# EAGLE board megashield_rs485 (EAGLE 7.3.0)
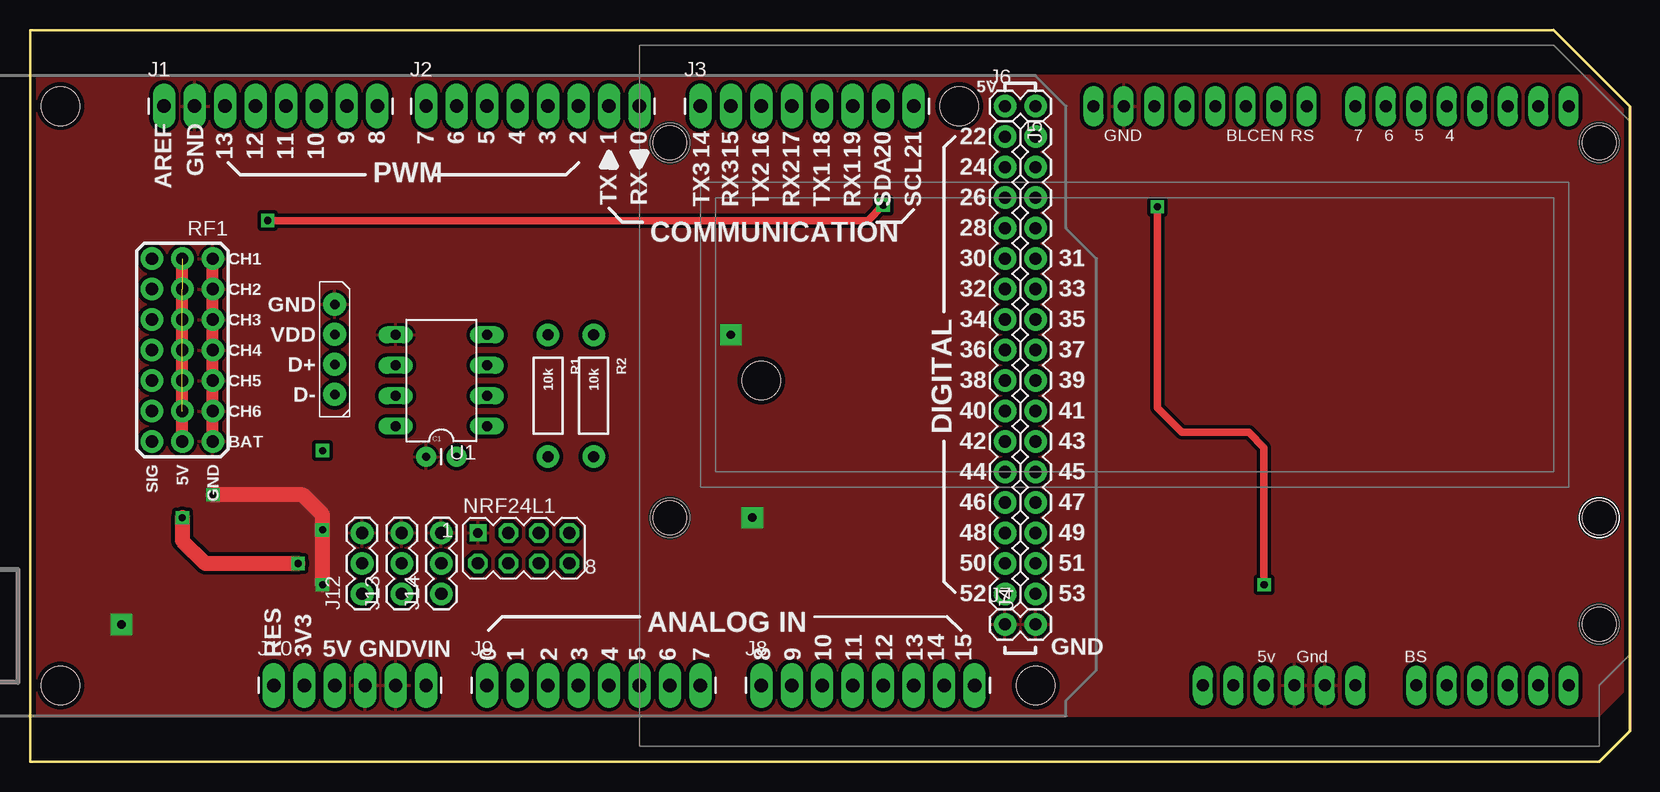
[diagram p0: board, top side]
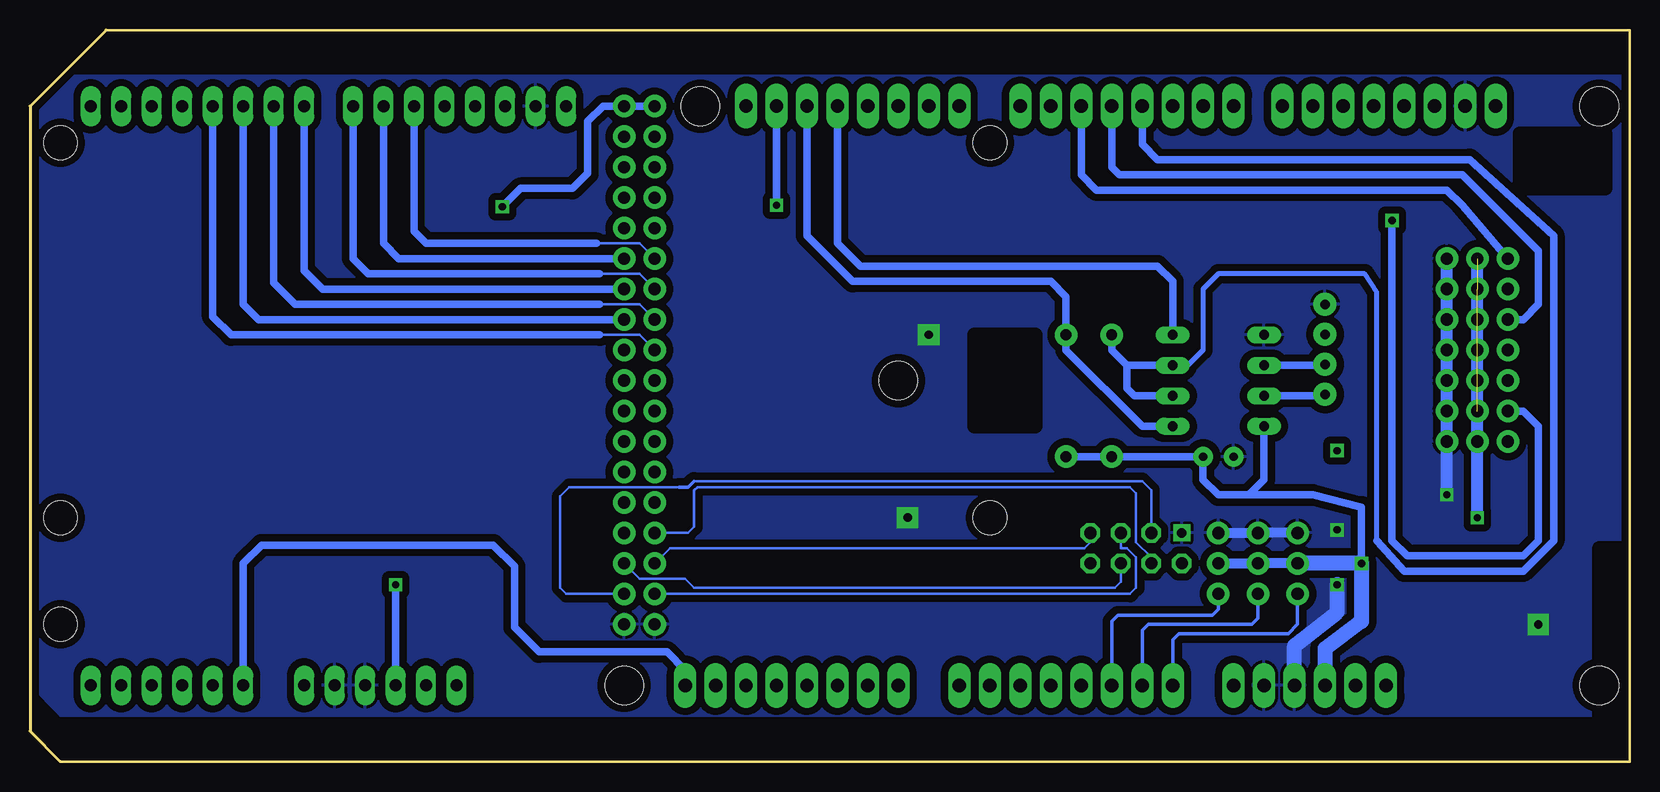
[diagram p1: board, bottom side, seen from below]

Size 133.35 x 60.96 mm. Coordinates in mm from the lower left corner, seen from the top.
Outline: 0,0 130.81,0 133.35,2.54 133.35,54.61 127,60.96 0,60.96 0,0
Copper layers (1*16): Top 0.035mm / dielectric 1.5mm / Bottom 0.035mm
Design rules "config_through_hole": minimum track width 8mil, minimum drill 20mil, track to track 9mil, track to pad 9mil, pad to pad 9mil, via to via 9mil, smd to smd 8mil, copper to edge 15mil, drill to drill 8mil, minimum pad ring 12mil, minimum via ring 10mil, stop-mask expansion 4mil, vias tented up to drill 25mil, thermal gap 10mil
Holes 3.2 mm at 2.54,54.61 2.54,6.35 77.47,54.61 83.82,6.35 60.96,31.75
Holes 2.8 mm at 130.81,51.56 130.81,20.32 130.81,11.43 53.34,20.32 53.34,51.56
bRestrict: area 49.5,27.9 to 54.6,35.6; area 2,47.8 to 9.1,52.3; area -12.7,34.3 to -1.3,57.2; area -12.7,3.8 to 2.5,17.8

## Footprints (pad centres in the part's own frame; a part is rotated, then mirrored left to right if it is on the bottom)
CAP-PTH-SMALL = drill 0.7 pad 1.651: 1 0,0; 2 2.54,0
1X08_LONGPADS = drill 1.118 pad 1.88 long: 1 0,0; 2 2.54,0; 3 5.08,0; 4 7.62,0; 5 10.16,0; 6 12.7,0; 7 15.24,0; 8 17.78,0
1X16 = drill 1.016 pad 1.88: 1 0,0; 2 2.54,0; 3 5.08,0; 4 7.62,0; 5 10.16,0; 6 12.7,0; 7 15.24,0; 8 17.78,0; 9 20.32,0; 10 22.86,0; 11 25.4,0; 12 27.94,0; 13 30.48,0; 14 33.02,0; 15 35.56,0; 16 38.1,0
1X02 = drill 1.016 pad 1.88: 1 0,0; 2 2.54,0
1X06_LONGPADS = drill 1.118 pad 1.88 long: 1 0,0; 2 2.54,0; 3 5.08,0; 4 7.62,0; 5 10.16,0; 6 12.7,0
DYNAMIXEL_SPOX_04 = drill 0.8 pad 1.93: 1 0,0; 2 2.5,0; 3 5,0; 4 7.5,0
1X03 = drill 1.016 pad 1.88: 1 0,0; 2 2.54,0; 3 5.08,0
LCD_SHIELD = drill 1 pad 1.676 long: 5V 52.07,5.08; BLC 50.546,53.34; BS 64.77,5.08; D4 67.31,53.34; D5 64.77,53.34; D6 62.23,53.34; D7 59.69,53.34; EN 53.086,53.34; GND@1 57.15,5.08; GND@2 54.61,5.08; GND@3 40.386,53.34; NC@1 37.846,53.34; NC@2 42.926,53.34; NC@3 45.466,53.34; NC@4 48.006,53.34; NC@5 69.85,53.34; NC@6 72.39,53.34; NC@7 74.93,53.34; NC@8 77.47,53.34; NC@9 46.99,5.08; NC@10 49.53,5.08; NC@11 59.69,5.08; NC@12 67.31,5.08; NC@13 69.85,5.08; NC@14 72.39,5.08; NC@15 74.93,5.08; NC@16 77.47,5.08; RS 55.626,53.34
NRF = drill 1.016 octagon: 2 -3.81,-1.27; 3 -1.27,1.27; 4 -1.27,-1.27; 5 1.27,1.27; 6 1.27,-1.27; 7 3.81,1.27; 8 3.81,-1.27 | drill 0.8 square: P$1 -3.81,1.27
AXIAL-0.4 = drill 0.9 pad 1.88: P$1 -5.08,0; P$2 5.08,0
FS_R6B = drill 1.016 pad 1.88: CH1 5.08,-15.24; CH2 5.08,-12.7; CH3 5.08,-10.16; CH4 5.08,-7.62; CH5 5.08,-5.08; CH6 5.08,-2.54; GND@1 0,0; GND@2 0,-2.54; GND@3 0,-5.08; GND@4 0,-7.62; GND@5 0,-10.16; GND@6 0,-12.7; GND@7 0,-15.24; NC 5.08,0; VCC@1 2.54,0; VCC@2 2.54,-2.54; VCC@3 2.54,-5.08; VCC@4 2.54,-7.62; VCC@5 2.54,-10.16; VCC@6 2.54,-12.7; VCC@7 2.54,-15.24
DIL08 = drill 0.813 long: 1 -3.81,-3.81; 2 -1.27,-3.81; 3 1.27,-3.81; 4 3.81,-3.81; 5 3.81,3.81; 6 1.27,3.81; 7 -1.27,3.81; 8 -3.81,3.81

## Placement (x,y rotation side)
C1  0.1u  [CAP-PTH-SMALL]  33.02,25.4 0 top
J1  [1X08_LONGPADS]  11.18,54.61 0 top
J2  [1X08_LONGPADS]  33.02,54.61 0 top
J3  [1X08_LONGPADS]  55.88,54.61 0 top
J4  [1X16]  83.82,13.97 90 top
J5  [1X16]  81.28,52.07 270 top
J6  [1X02]  81.28,54.61 0 top
J7  [1X02]  81.28,11.43 0 top
J8  [1X08_LONGPADS]  60.96,6.35 0 top
J9  [1X08_LONGPADS]  38.1,6.35 0 top
J10  [1X06_LONGPADS]  20.32,6.35 0 top
J11  DYNAMIXEL_RS485  [DYNAMIXEL_SPOX_04]  25.4,38.1 270 top
J12  [1X03]  27.69,13.97 90 top
J13  [1X03]  30.99,13.97 90 top
J14  [1X03]  34.29,13.97 90 top
LCD  LCD_SHIELD  [LCD_SHIELD]  50.8,1.27 0 top
NRF24L1  [NRF]  41.15,17.78 0 top
R1  10k  [AXIAL-0.4]  43.18,30.48 270 top
R2  10k  [AXIAL-0.4]  46.99,30.48 270 top
RF1  FS_R6B  [FS_R6B]  15.24,26.67 180 top
U1  RS485  [DIL08]  34.29,31.75 90 top

## Library data of the parts
C1 J1-J14 LCD NRF24L1 R1 R2 RF1 U1 = mecatronica_eagle_lib

## Nets
3.3: J10.2
5V: C1.2 J10.3 J12.2 J13.2 J14.2 R1.P$2 R2.P$2 RF1.VCC@1 RF1.VCC@2 RF1.VCC@3 RF1.VCC@4 RF1.VCC@5 RF1.VCC@6 RF1.VCC@7 U1.8
5V@1: J6.1 J6.2 LCD.5V
A0: J9.1 J12.1
A1: J9.2 J13.1
A2: J9.3 J14.1
A3: J9.4
A4: J9.5
A5: J9.6
A6: J9.7
A7: J9.8
A8: J8.1
A9: J8.2
A10: J8.3
A11: J8.4
A12: J8.5
A13: J8.6
A14: J8.7
A15: J8.8 LCD.BS
AREF: J1.1
D2: J2.6 RF1.CH1
D3: J2.5 RF1.CH3
D4: J2.4 R1.P$1 U1.2 U1.3
D5: J2.3
D6: J2.2
D7: J2.1
D8: J1.8
D9: J1.7
D10: J1.6
D11: J1.5
D12: J1.4
D13: J1.3
D20: J3.7 RF1.CH6
D21: J3.8
D22: J5.1
D23: J4.16
D24: J5.2
D25: J4.15
D26: J5.3
D27: J4.14
D28: J5.4
D29: J4.13
D30: J5.5 LCD.BLC
D31: J4.12 LCD.EN
D32: J5.6 LCD.RS
D33: J4.11 LCD.D7
D34: J5.7 LCD.D6
D35: J4.10 LCD.D5
D36: J5.8 LCD.D4
D37: J4.9
D38: J5.9
D39: J4.8
D40: J5.10
D41: J4.7
D42: J5.11
D43: J4.6
D44: J5.12
D45: J4.5
D46: J5.13
D47: J4.4
D48: J5.14 NRF24L1.4
D49: J4.3
D50: J5.15 NRF24L1.7
D51: J4.2 NRF24L1.6
D52: J5.16 NRF24L1.5
D53: J4.1 NRF24L1.3
GND: C1.1 J1.2 J7.1 J7.2 J10.4 J10.5 J11.1 J12.3 J13.3 J14.3 LCD.GND@1 LCD.GND@2 LCD.GND@3 NRF24L1.P$1 RF1.GND@1 RF1.GND@2 RF1.GND@3 RF1.GND@4 RF1.GND@5 RF1.GND@6 RF1.GND@7 U1.5
N$1: J11.3 U1.6
N$2: J11.4 U1.7
N$4: RF1.CH2
N$6: RF1.CH4
N$7: RF1.CH5
N$10: NRF24L1.2
RES: J10.1
RX0: J2.8
RX1: J3.6 R2.P$1 U1.1
RX2: J3.4
RX3: J3.2
TX0: J2.7
TX1: J3.5 U1.4
TX2: J3.3
TX3: J3.1
VDD: J11.2
VIN: J10.6

## Tracks (layer width: path | path; a pad name or v marks a point on that pad's centre or on a via)
5V  (via drill 0.6)  (5 unrouted)
  Top 1.27: v12.7,20.32 12.7,18.41 14.61,16.51 v22.35,16.51
  Bottom 0.61: R2.P$2 R1.P$2 C1.2 35.56,23.49 34.29,22.22 31.75,22.22 | 31.75,22.22 26.42,22.22 22.35,21.21 v22.35,16.51 | U1.8 30.48,23.49 31.75,22.22
  Bottom 0.813: J14.2 J13.2 J12.2
  Bottom 1.016: v12.7,20.32 RF1.VCC@1
  Bottom 1.27: J12.2 v22.35,16.51 22.35,11.68 25.4,9.4 J10.3
5V@1  (via drill 0.6)
  Top 0.61: v93.98,46.23 93.98,29.46 96.01,27.43 101.6,27.43 102.87,26.16 v102.87,14.73
  Bottom 0.61: J6.1 J6.2 85.6,54.61 86.87,53.34 86.87,49.02 88.14,47.75 92.46,47.75 v93.98,46.23 | v102.87,14.73 LCD.5V
A0
  Bottom 0.305: J9.1 38.1,10.16 37.59,10.67 28.45,10.67 27.69,11.43 J12.1
A1
  Bottom 0.305: J9.2 40.64,10.92 40.13,11.43 31.5,11.43 30.99,11.94 J13.1
A2
  Bottom 0.305: J9.3 43.18,11.68 42.67,12.19 34.8,12.19 34.29,12.7 J14.1
A15
  Bottom 0.61: J8.8 78.74,7.62 80.26,9.14 90.93,9.14 92.96,11.18 92.96,16.26 94.74,18.03 114.05,18.03 115.57,16.51 LCD.BS
D2
  Bottom 0.61: J2.6 45.72,48.9 44.45,47.62 15.24,47.62 13.97,46.36 RF1.CH1
D3
  Bottom 0.61: J2.5 43.18,49.53 42.55,48.9 13.97,48.9 7.62,42.55 7.62,38.1 8.89,36.83 RF1.CH3
D4
  Bottom 0.305: 36.83,33.02 U1.3
  Bottom 0.406: 21.08,18.41 21.08,39.12 22.1,40.64 34.29,40.64 35.56,39.37 35.56,34.29 36.83,33.02
  Bottom 0.61: J2.4 40.64,51.44 39.37,50.16 13.34,50.16 6.35,43.82 6.35,18.41 8.89,15.88 18.8,15.88 21.08,18.41 | U1.3 41.91,33.02 | 41.91,33.02 43.18,34.29 R1.P$1 | U1.2 41.28,30.48 41.91,31.11 41.91,33.02
D20  (via drill 0.6)
  Top 0.61: v19.81,45.09 69.85,45.09 v71.12,46.36
  Bottom 0.61: v71.12,46.36 J3.7 | RF1.CH6 8.89,29.21 7.62,27.94 7.62,18.41 8.89,17.14 18.54,17.14 19.81,18.41 v19.81,45.09
D30
  Bottom 0.203: J5.5 82.55,43.18 86.11,43.18
  Bottom 0.61: 86.11,43.18 100.33,43.18 101.35,44.2 LCD.BLC
D31
  Bottom 0.61: J4.12 102.62,41.91 103.89,43.18 LCD.EN
D32
  Bottom 0.203: J5.6 82.55,40.64 85.85,40.64
  Bottom 0.61: 85.85,40.64 105.16,40.64 106.43,41.91 LCD.RS
D33
  Bottom 0.61: J4.11 108.97,39.37 110.49,40.89 LCD.D7
D34
  Bottom 0.203: J5.7 82.55,38.1 85.85,38.1
  Bottom 0.61: 85.85,38.1 111.25,38.1 113.03,39.88 LCD.D6
D35
  Bottom 0.61: LCD.D5 115.57,38.1 114.3,36.83 J4.10
D36
  Bottom 0.203: J5.8 82.55,35.56 85.85,35.56
  Bottom 0.61: 85.85,35.56 116.59,35.56 118.11,37.08 LCD.D4
D48
  Bottom 0.203: NRF24L1.4 39.88,17.02 41.15,18.29 41.15,22.35 41.66,22.86 77.72,22.86 77.98,22.61 77.98,19.56 78.49,19.05 J5.14
D50
  Bottom 0.203: NRF24L1.7 44.96,18.29 45.47,17.78 80.01,17.78 J5.15
D51
  Bottom 0.203: NRF24L1.6 42.42,14.99 42.93,14.48 77.98,14.48 78.74,15.24 82.55,15.24 J4.2
D52
  Bottom 0.203: NRF24L1.5 42.42,17.78 41.91,17.78 41.15,17.02 41.15,14.48 41.66,13.97 J5.16
D53
  Bottom 0.203: NRF24L1.3 39.88,22.61 40.64,23.37 77.98,23.37 | 79.25,22.86 88.39,22.86 89.15,22.1 89.15,14.48 88.65,13.97 J4.1
  Bottom 0.305: 77.98,23.37 78.49,22.86 79.25,22.86
GND  (via drill 0.6, 0.7 pad 1.78)
  Top 1.27: v24.38,14.73 v24.38,19.3 24.38,20.57 22.73,22.22 v15.24,22.22
  Bottom 0.813: J12.3 J13.3 J14.3
  Bottom 1.016: v15.24,22.22 RF1.GND@1
  Bottom 1.27: J10.4 27.94,9.65 24.38,12.45 v24.38,14.73
  other vias: 7.62,11.43 60.2,20.32 58.42,35.56
  pour Bottom (isolate 0.61): -12.7,3.81 130.81,3.81 133.35,6.35 133.35,54.61 130.81,57.15 -12.7,57.15
  pour Top (isolate 0.305): -12.7,3.81 130.81,3.81 133.35,6.35 133.35,54.61 130.81,57.15 -12.7,57.15
N$1
  Bottom 0.61: U1.6 25.48,33.02 J11.3
N$2
  Bottom 0.61: U1.7 25.52,30.48 J11.4
N$3  (via drill 0.6)
  other vias: 24.38,25.91
RX1
  Bottom 0.61: U1.1 40.64,27.94 46.99,34.29 R2.P$1 46.99,38.73 48.26,40.01 64.77,40.01 68.58,43.82 J3.6
TX1
  Bottom 0.61: U1.4 38.1,40.01 39.37,41.28 64.13,41.28 66.04,43.18 J3.5

## Text on the board
tPlace: 5V | 9 | 8 | 7 | 6 | 5 | 4 | 3 | 2 | 1 | 0 | 22 | 13 | 12 | 11 | 10 | 14 | 15 | 16 | 17 | 18 | 19 | 20 | 21 | GND | 24 | AREF | PWM | TX | RX | 26 | TX3 | RX3 | TX2 | RX2 | TX1 | RX1 | SDA | SCL | 28 | COMMUNICATION | 30 | 31 | 32 | 33 | 34 | 35 | 36 | 37 | 38 | 39 | 40 | 41 | DIGITAL | 42 | 43 | 44 | 45 | 46 | 47 | 48 | 49 | 50 | 51 | 52 | 53 | ANALOG IN | RES | 3V3 | 5V | GND | VIN | 0 | 1 | 2 | 3 | 4 | 5 | 6 | 7 | 8 | 9 | 10 | 11 | 12 | 13 | 14 | 15 | GND
tDocu: USB | PWR